# EAGLE board Altimeter (EAGLE 9.6.2)
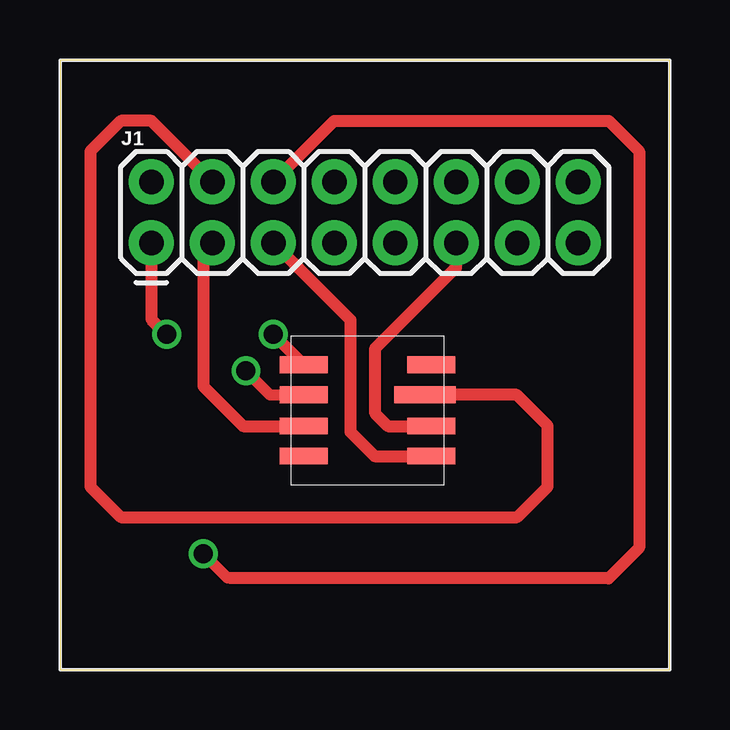
[diagram p0: board, top side]
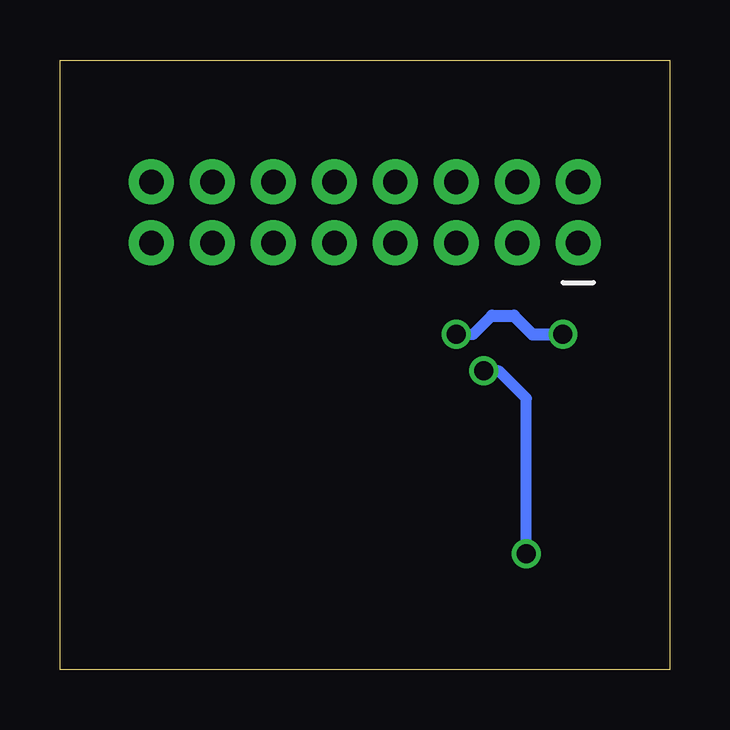
[diagram p1: board, bottom side, seen from below]

Size 25.4 x 25.4 mm. Coordinates in mm from the lower left corner, seen from the top.
Outline: 0,0 25.4,0 25.4,25.4 0,25.4 0,0
Copper layers (1*16): Top 0.035mm / dielectric 1.5mm / Bottom 0.035mm
Design rules "Bantam PCB Mill Design Rules": minimum track width 18mil, minimum drill 31.25mil, track to track 18mil, track to pad 18mil, pad to pad 6mil, via to via 18mil, smd to smd 6mil, copper to edge 40mil, drill to drill 6mil, minimum pad ring 10mil, minimum via ring 8mil, stop-mask expansion 4mil, vias tented up to drill 0mil, thermal gap 10mil

## Footprints (pad centres in the part's own frame; a part is rotated, then mirrored left to right if it is on the bottom)
2X7 = drill 1.016 pad 1.88: 1 -8.89,5.08; 2 -8.89,7.62; 3 -6.35,5.08; 4 -6.35,7.62; 5 -3.81,5.08; 6 -3.81,7.62; 7 -1.27,5.08; 8 -1.27,7.62; 9 1.27,5.08; 10 1.27,7.62; 11 3.81,5.08; 12 3.81,7.62; 13 6.35,5.08; 14 6.35,7.62; 15 8.89,5.08; 16 8.89,7.62
ALTIMETER = smd 2 x 0.7: P$1 5.3,-3.8; P$2 5.3,-2.55; P$4 5.3,0; P$5 0,0; P$6 0,-1.25; P$7 0,-2.55; P$8 0,-3.8 | smd 2.55 x 0.7: P$3 5.05,-1.25

## Placement (x,y rotation side)
J1  2X6 FEMALE  [2X7]  12.7,12.7 0 top
U$1  ALTIMETER  [ALTIMETER]  10.16,12.7 0 top

## Library data of the parts
J1 = RTR; PROD_ID: CONN-12423
U$1 = my-library

## Nets
N$1: J1.3 U$1.P$7
N$2: J1.5 U$1.P$1
N$3: J1.1 U$1.P$5
N$4: J1.11 U$1.P$2
N$5: J1.4 U$1.P$3
N$6: J1.6 U$1.P$6

## Tracks (layer width: path | path; a pad name or v marks a point on that pad's centre or on a via)
N$1
  Top 0.508: J1.3 5.97,17.4 5.97,11.81 7.63,10.15 U$1.P$7
N$2
  Top 0.508: J1.5 12.1,14.57 12.1,9.91 13.11,8.9 U$1.P$1
N$3  (via drill 0.79)
  Top 0.508: U$1.P$5 v8.89,13.97 | J1.1 3.81,14.61 v4.45,13.97
  Bottom 0.457: v8.89,13.97 8.18,13.97 7.41,14.75
  Bottom 0.508: 7.41,14.75 6.49,14.75 5.71,13.97 v4.45,13.97
N$4
  Top 0.457: J1.11 16.51,16.76
  Top 0.508: 16.51,16.76 13.14,13.39 13.14,10.67 13.66,10.15 U$1.P$2
N$5
  Top 0.508: J1.4 3.81,22.86 2.54,22.86 1.27,21.59 1.27,7.62 2.54,6.35 19.05,6.35 20.32,7.62 20.32,10.16 19.03,11.45 U$1.P$3
N$6  (via drill 0.79)
  Top 0.457: 7.1,3.81 6.99,3.81 v5.97,4.83 | v7.75,12.45 8.74,11.45 U$1.P$6
  Top 0.508: J1.6 11.43,22.86 22.86,22.86 24.13,21.59 24.13,5.08 22.84,3.79 22.83,3.81 7.1,3.81
  Bottom 0.457: v5.97,4.83 5.97,11.3 7.11,12.45 v7.75,12.45